# Altium PCB PCB2.PcbDoc
Units mm, origin at the board's own origin, x right, y up, seen from the top; angles counter-clockwise.
Board outline 14 x 16.26 mm, 2 copper layers (Top Layer - Signal, Bottom Layer - Signal), stack 1.27 mm thick; 8 components, 7 nets, 32 pads, 11 vias.
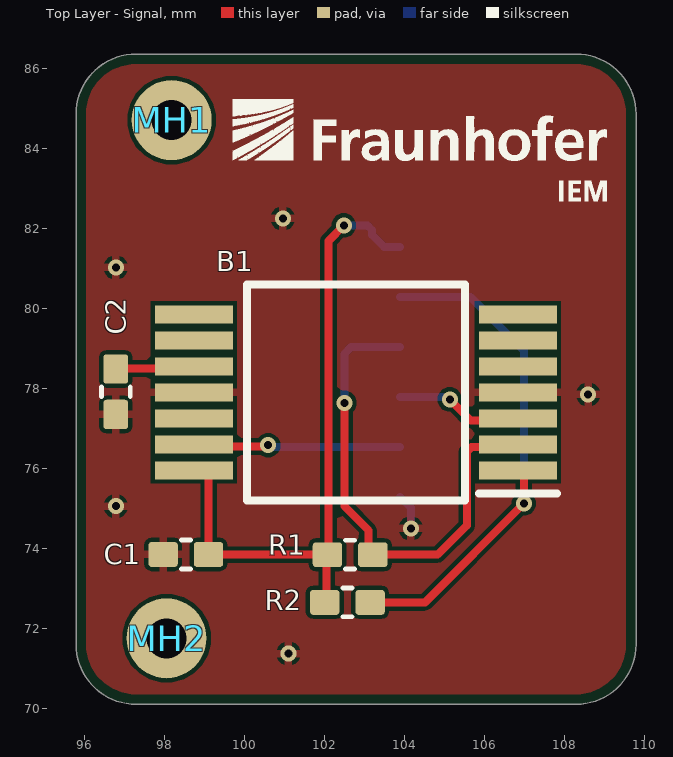
[diagram p0: Top Layer - Signal view]
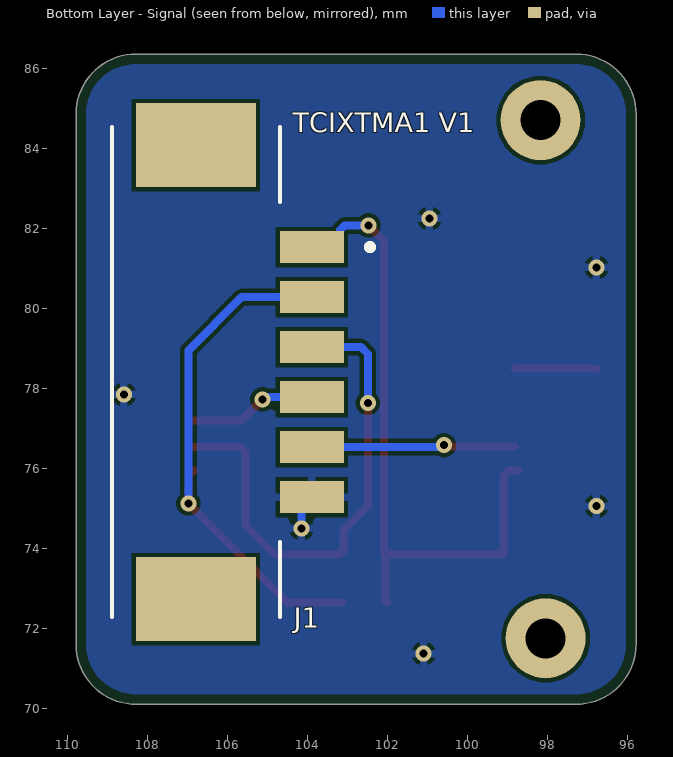
[diagram p1: Bottom Layer - Signal view, seen from below]
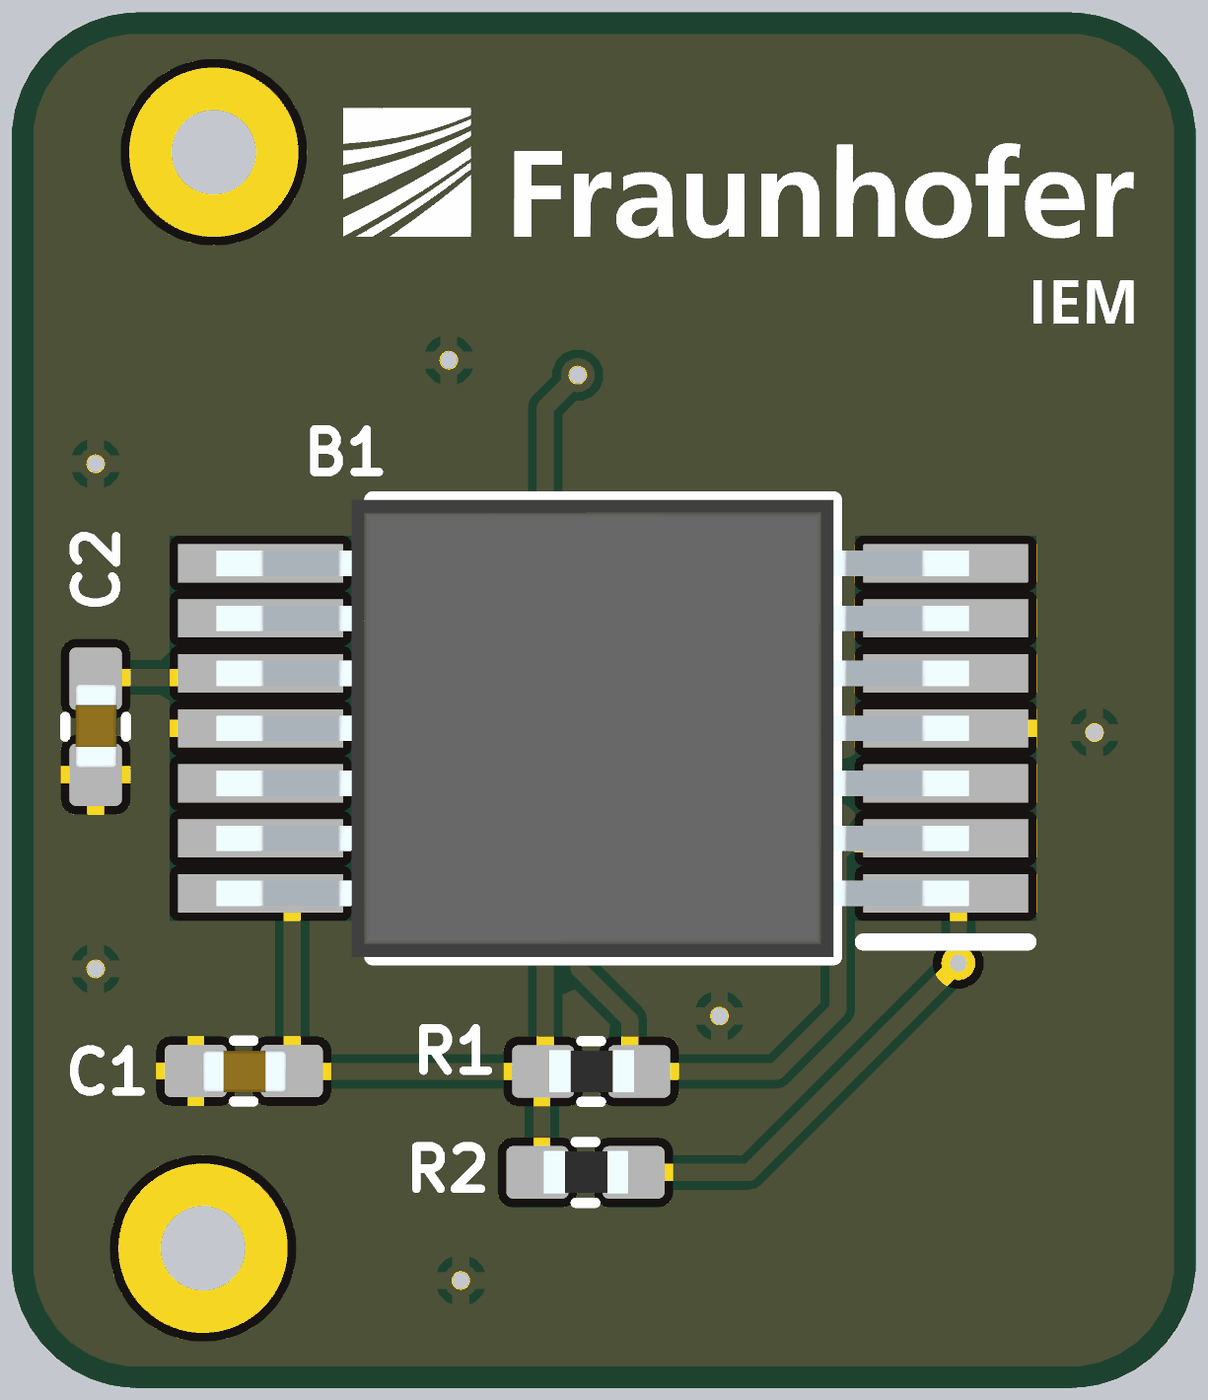
[diagram p2: 3D render of the assembled board from above, using the file's embedded part models]

## Layer stack, top to bottom
Top Solder: solder mask 0.0102, Solder Resist, Dk 3.5
Top Layer - Signal: signal copper 0.035
Dielectric 1: dielectric 1.2, FR-4, Dk 4.8
Bottom Layer - Signal: signal copper 0.035
Bottom Solder: solder mask 0.0102, Solder Resist, Dk 3.5

## Board outline
95.782,71.604 95.782,84.86 cw(c97.282,84.86) 97.282,86.36 108.282,86.36 cw(c108.282,84.86) 109.782,84.86 109.782,71.604 cw(c108.282,71.604) 108.282,70.104 97.282,70.104 cw(c97.282,71.604)

## Design rules (kind name [scope] priority, off if disabled: settings)
BoardOutlineClearance [All] p1: gap=0.25 ignorepadtopadclearanceinfootprint=FALSE
Clearance [All] p1: gap=0.1 ignorepadtopadclearanceinfootprint=FALSE
HoleSize [All] p1: absolutevalues=TRUE maxlimit=3.2 minlimit=0.025 maxpercent=80.000 minpercent=20.000
MinimumSolderMaskSliver [All] p1: minsoldermaskwidth=0.1
PlaneClearance [All] p1: clearance=0.1
PlaneConnect [All] p1: planeconnectstyle=Relief reliefexpansion=0.508 reliefentries=4 reliefconductorwidth=0.4 reliefairgap=0
PolygonConnect [All] p1: connectstyle=Relief reliefconductorwidth=0.2 reliefentries=4 polygonreliefangle="90 Angle" airgapwidth=0.1
RoutingVias [All] p1: holewidth=0.2 width=0.4 viastyle="Through Hole" minholewidth=0.2 minwidth=0.4 maxholewidth=0.3 maxwidth=0.6
SilkToSilkClearance [All] p1: silktosilkclearance=0.003
SilkToSolderMaskClearance [IsPad] p1: minsilkscreentomaskgap=0.003 clearancetoexposedcopper=TRUE
SolderMaskExpansion [All] p1: expansion=0.102 istentingtop=FALSE
SupplyNets "Schematic Supply Nets_1" [InNet('3V3')] p1: voltage=0.000
SupplyNets "Schematic Supply Nets" [InNet('GND')] p2: voltage=0.000
Width [All] p1: maxlimit=1 minlimit=0.15 preferedwidth=0.2
24 further rules are at their usual default settings.

## Components (designator, comment, footprint, x,y, rotation, side; value= is the part's Value field where it differs from the comment)
B1 "TCIXTMA1" SOP65P890X370-14N 102.775,77.9 r180 top
C1 "100nF" "Capacitor 0402_1005Metric SMD" 98.525,73.9 r180 top
C2 "10nF" "Capacitor 0402_1005Metric SMD" 96.724,77.919 r270 top
J1 "53261-0671" 53261-0671 105.336,78.409 r270 bottom locked
MH1 "MH_1mm" MountingHole_1mm_M1 98.171,84.709 r0 top
MH2 "MH_1mm" MountingHole_1mm_M1 98.044,71.755 r0 top
R1 "2.2K" "Resistor 0402_1005Metric SMD" 102.634,73.895 r180 top
R2 "2.2K" "Resistor 0402_1005Metric SMD" 102.566,72.702 r180 top

## Footprints (in the part's own frame and the unit in brackets; to place one, negate y for a bottom-side part, rotate by r counter-clockwise, add the part's x,y. Pads: shape width x height; smd on the part's side, far side on the other; paste and mask are expansions set on the pad)
53261-0671 [mm] "PicoBlade 1x6 Horizontal PCB Header"
  rect 0.8x1.6 smd: 1(-3.125,1.45) 2(-1.875,1.45) 3(-0.625,1.45) 4(0.625,1.45) 5(1.875,1.45) 6(3.125,1.45)
  rect 2.1x3 smd: MP1(-5.675,-1.45) MP2(5.675,-1.45)
  silkscreen extent -6.12,-3.55 6.12,2.95, body extent -6.35,-3.4 6.3,1.8, height 3.41
"Capacitor 0402_1005Metric SMD" [mm] "0402_1005Metric"
  rrect25% 0.735x0.62 smd: 1(-0.567,0.05) 2(0.567,0.05)
  silkscreen extent -0.12,-0.31 0.12,0.41, body extent -0.51,-0.2 0.49,0.3, height 0.55
MountingHole_1mm_M1 [mm]
  round 2 hole 1: 1(0,0)
"Resistor 0402_1005Metric SMD" [mm] "0402_1005Metric"
  rrect25% 0.735x0.62 smd: 1(-0.567,0.05) 2(0.567,0.05)
  silkscreen extent -0.12,-0.31 0.12,0.41, body extent -0.51,-0.2 0.49,0.3, height 0.4
SOP65P890X370-14N [mm]
  rect 1.95x0.45 smd: 1(-4.05,1.95) 2(-4.05,1.3) 3(-4.05,0.65) 4(-4.05,0) 5(-4.05,-0.65) 6(-4.05,-1.3) 7(-4.05,-1.95) 8(4.05,-1.95) 9(4.05,-1.3) 10(4.05,-0.65) 11(4.05,0) 12(4.05,0.65) 13(4.05,1.3) 14(4.05,1.95)
  silkscreen extent -5.02,-2.7 2.73,2.7, body extent -4.33,-2.7 4.58,2.7, height 3.7

## Part data
B1: "Air Quality Sensors XENSIV TCI Integrated Thermal Conductivity Gas Sensor , 3.135V ~ 3.465V ,-40C ~ 105C", Manufacturer_Name=Infineon, Datasheet Link=https://www.infineon.com/assets/row/public/documents/24/49/infineon-tci-datasheet-en.pdf, Geometry.Height=3.7mm, Manufacturer_Part_Number=TCIXTMA1
C1 C2: library part "Capacitor 0402_1005Metric SMD", "Capacitor 0402_1005Metric SMD"
J1: "PicoBlade 1x6 Horizontal  / PCB Header 1.25mm Pitch"
MH1 MH2: library part MountingHole_1mm_M1
R1 R2: library part "Resistor 0402_1005Metric SMD", "Resistor 0402_1005Metric SMD"

## Via types
v1: diameter 0.4, hole 0.2, Top Layer - Signal to Bottom Layer - Signal, tented both sides, 10 vias
v2: diameter 0.4, hole 0.2, Top Layer - Signal to Bottom Layer - Signal, 1 vias

## Nets (pads, with @x,y where several pads share a name; then routed paths per layer and width w, separated by ;. In a path a pad name is that pad's centre, name@x,y a point inside that pad or via, vN(x,y) a via of type N, cw(c..) or ccw(c..) an arc to the next point about the centre after c; other vN are vias at no path point)
3V3: B1.14 C1.1 J1.1 R1.2 R2.2 | length 16.7
  Top Layer - Signal w0.2: B1.14 98.972,75.95 99.097,75.825 99.097,73.845 R1.2 ; R2.2 102.049,72.702 102.049,73.828 R1.2 ; v1(102.475,82.075) 102.089,81.689 102.089,73.868 R1.2
  Bottom Layer - Signal w0.2: v1(102.475,82.075) 103.069,82.075 103.186,81.958 103.186,81.834 103.486,81.534 J1.1
GND: B1.4 B1.11 C1.2 C2.2 J1.6 | length 0.9
  Bottom Layer - Signal w0.2: J1.6 104.15,75.02 v1(104.15,74.5)
  other v1: 101.092,71.374 96.774,75.057 108.585,77.851 96.774,81.026 100.95,82.25
NetB1_10: B1.10 C2.1 | length 2.1
  Top Layer - Signal w0.2: C2.1 96.789,78.501 B1.10@98.82,78.501
SCL: B1.1 J1.2 R2.1 | length 13.2
  Top Layer - Signal w0.2: R2.1 104.502,72.652 v2(106.975,75.125) 106.975,75.825 106.85,75.95 B1.1
  Bottom Layer - Signal w0.2: J1.2 105.644,80.284 106.975,78.953 v2(106.975,75.125)
SDA: B1.2 J1.3 R1.1 | length 12.7
  Top Layer - Signal w0.2: v1(102.489,77.637) 102.489,75.057 103.091,74.455 103.091,73.955 R1.1 104.82,73.845 105.551,74.576 105.551,76.415 105.668,76.533 106.902,76.533 B1.2@106.92,76.551
  Bottom Layer - Signal w0.2: v1(102.489,77.637) 102.489,78.867 102.656,79.034 J1.3
STDBY: B1.13 J1.5 | length 5.1
  Top Layer - Signal w0.2: B1.13@98.82,76.551 100.554,76.551 v1(100.584,76.581)
  Bottom Layer - Signal w0.2: v1(100.584,76.581) 100.638,76.581 100.685,76.534 J1.5
WAKEUP: B1.3 J1.4 | length 3.3
  Top Layer - Signal w0.2: v1(105.125,77.725) 105.649,77.201 B1.3@106.92,77.201
  Bottom Layer - Signal w0.2: J1.4 105.012,77.784 105.071,77.725 v1(105.125,77.725)
pads on no net: B1.5 B1.6 B1.7 B1.8 B1.9 B1.12 J1.MP1 J1.MP2 MH1.1 MH2.1

## Polygon pours and split planes (outlines as drawn)
GND on Bottom Layer - Signal "NONET_L-01_P-001" (solid, pour order 3): 95.797,86.36 110.075,86.36 110.075,70.104 95.637,70.104
GND on Top Layer - Signal "GND_L01_P000" (solid, pour order 0): 95.797,86.36 110.075,86.36 110.075,70.104 95.637,70.104

## Silkscreen, mask and mechanical layers (free items; w line width, h text height)
Top Overlay:
  drawing of 19 lines, arcs and shapes, not listed
Bottom Overlay:
  text "TCIXTMA1 V1" at 104.371,84.24 h0.85

## Text inside footprints (layer, text, board x,y; h text height)
C1: Mechanical 6 "%R" at 98.786,74.015 h0.25 r180
C2: Mechanical 6 "%R" at 96.609,78.179 h0.25 r270
J1: Mechanical 6 "%R" at 106.875,79.785 h1.27 r90
MH1: Mechanical 6 "%R" at 97.271,84.184 h1
MH2: Mechanical 6 "%R" at 97.144,71.23 h1
R1: Mechanical 6 "%R" at 102.894,74.01 h0.25 r180
R2: Mechanical 6 "%R" at 102.827,72.817 h0.25 r180